# Altium PCB STM32F103Mini-260711.PcbDoc
Units mil, origin at the board's own origin, x right, y up, seen from the top; angles counter-clockwise.
Board outline 3149.61 x 2362.2 mil, 2 copper layers (Top Layer, Bottom Layer); 48 components, 52 nets, 221 pads, 78 vias.
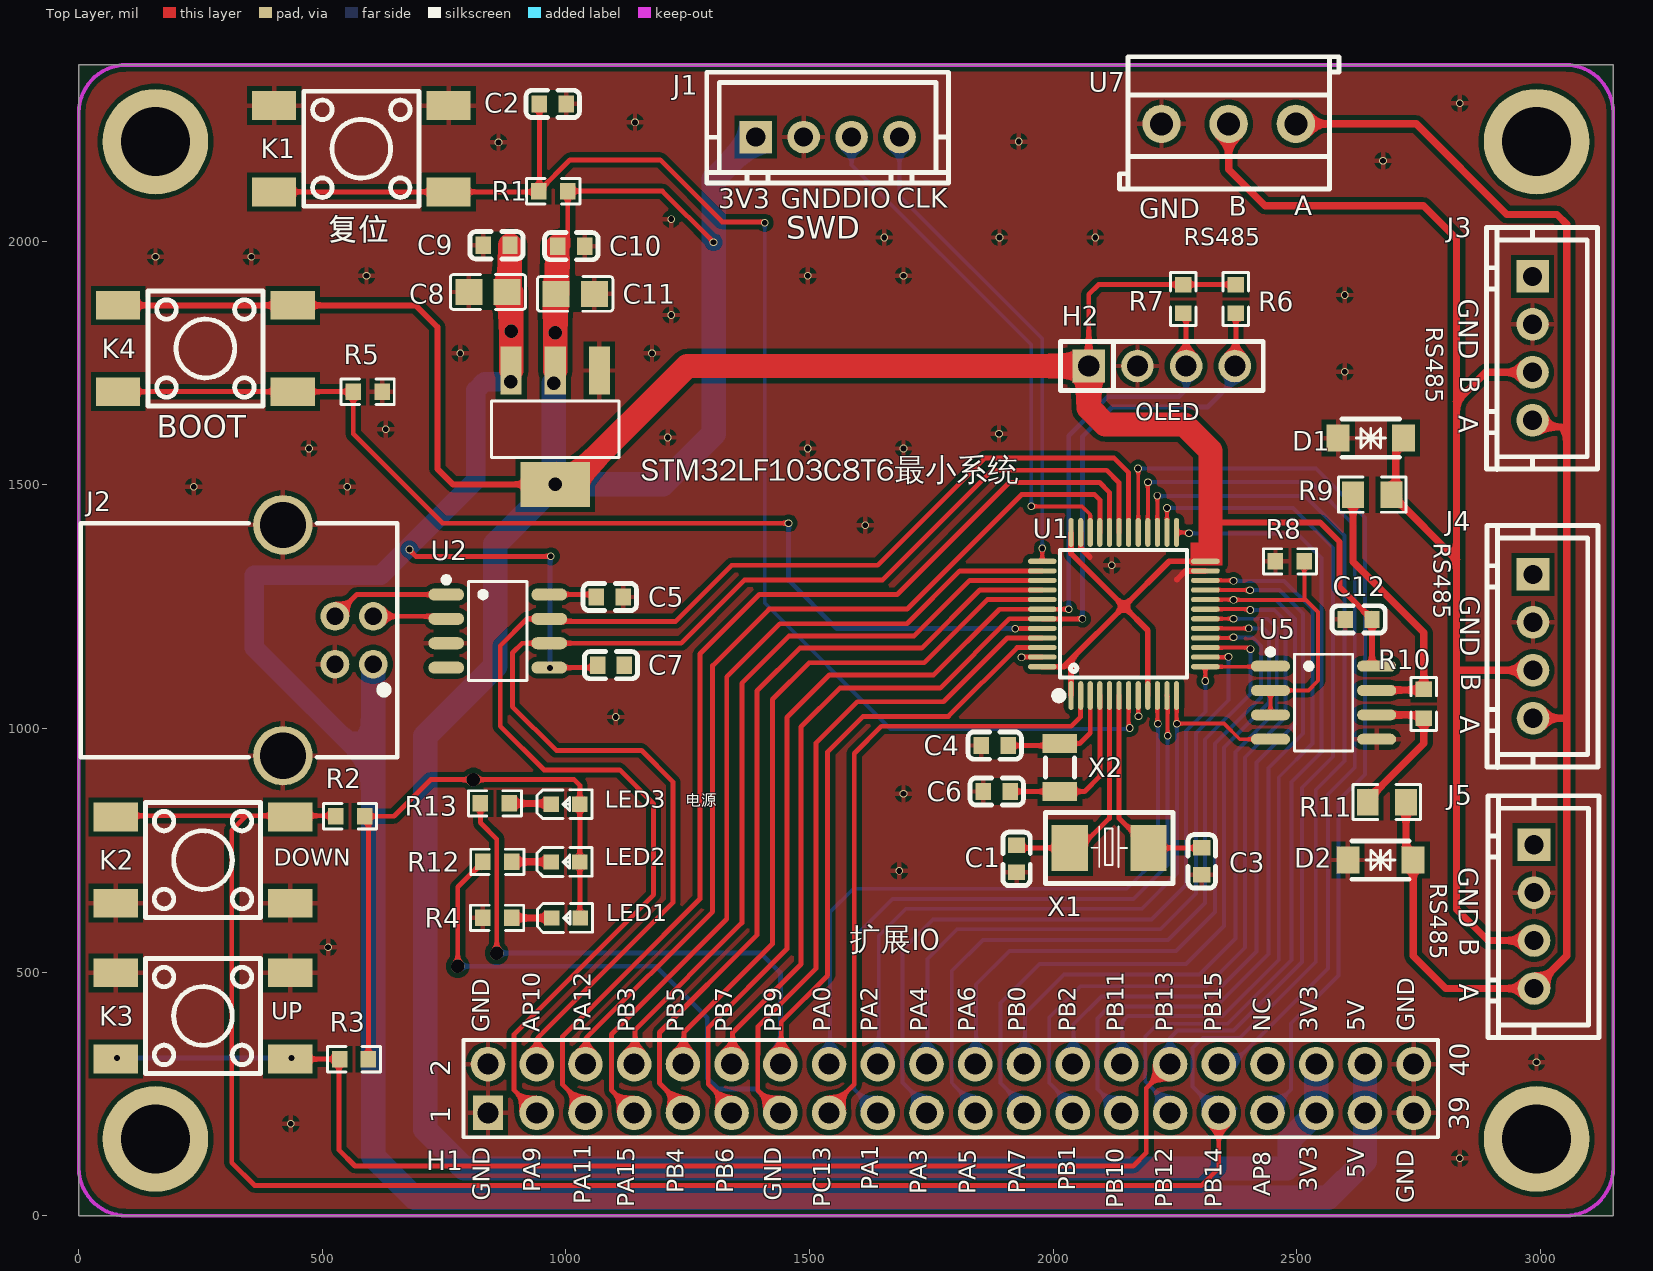
[diagram p0: Top Layer view]
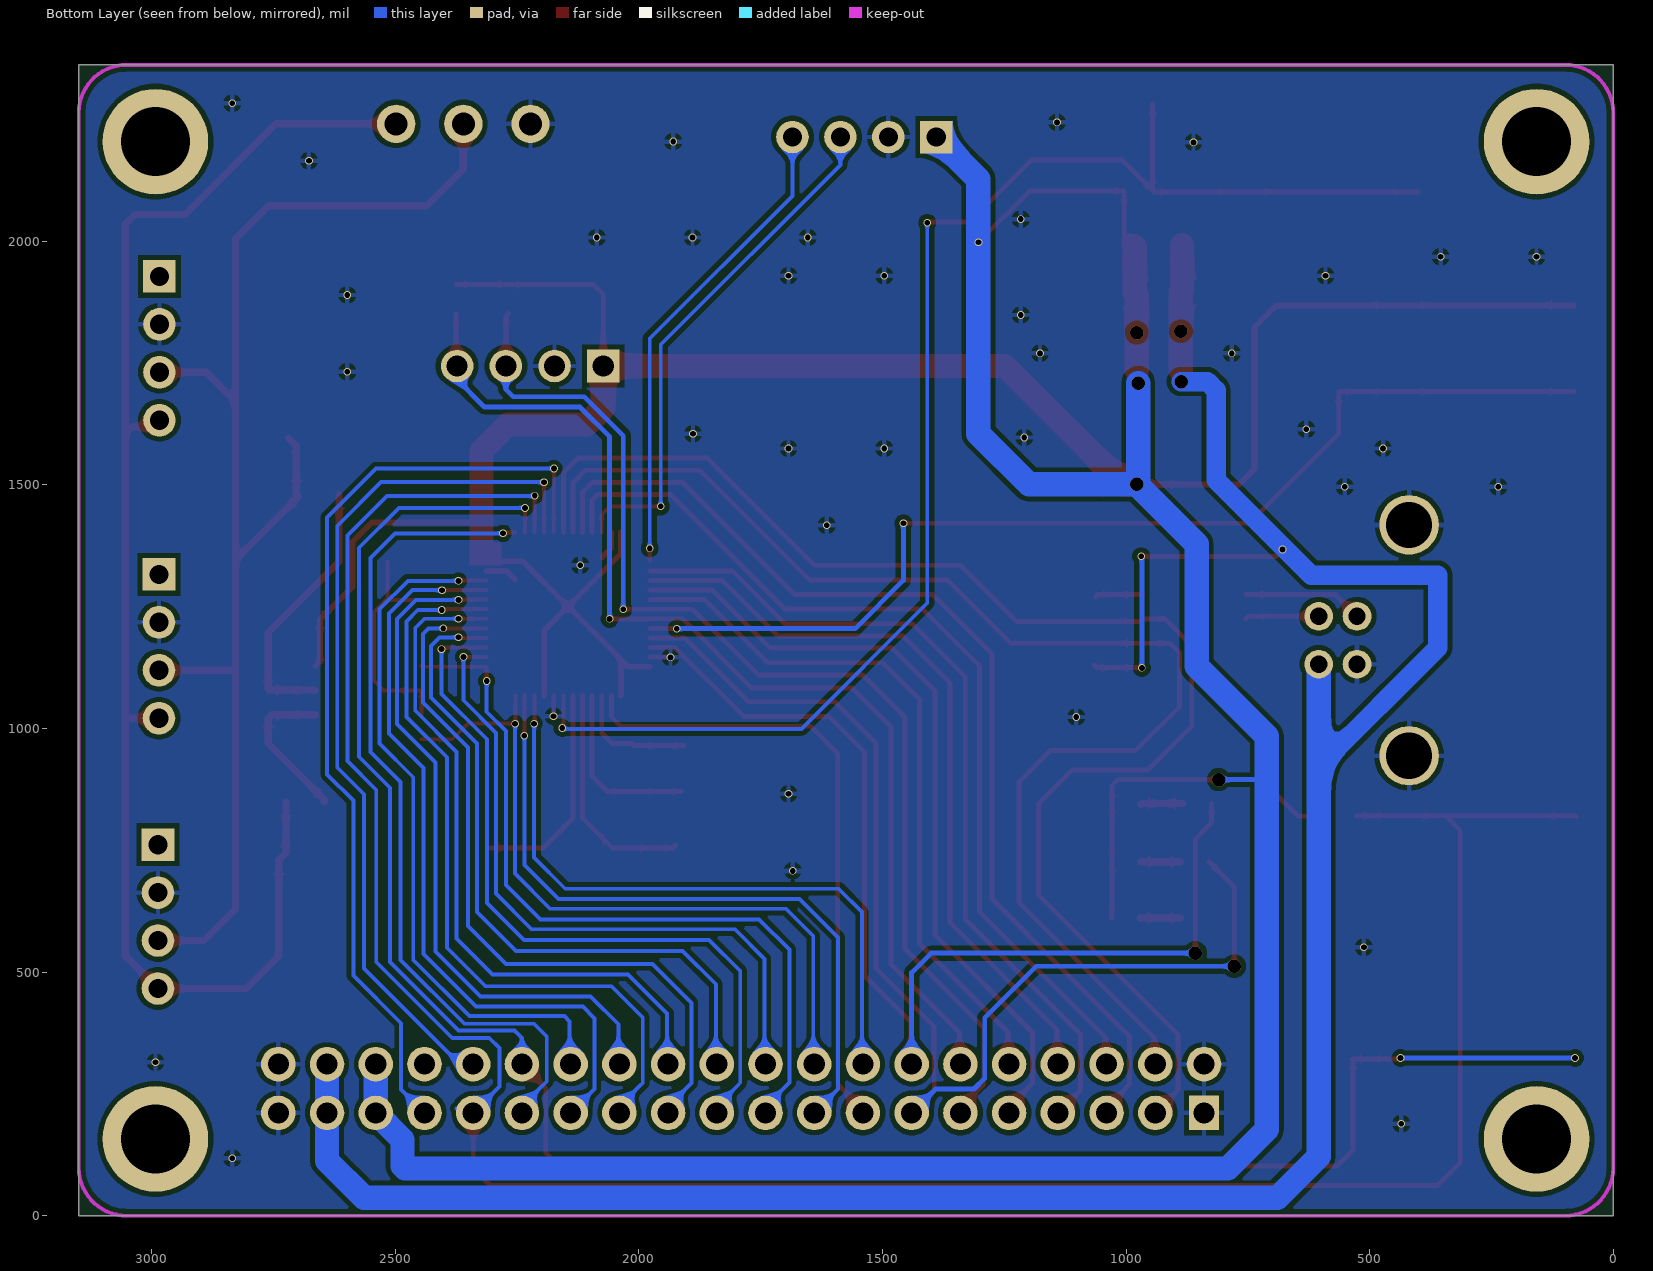
[diagram p1: Bottom Layer view, seen from below]

## Layer stack, top to bottom
Top Solder: solder mask 0.4, Solder Resist, Dk 3.5
Top Layer: signal copper 1.4
Dielectric 1: dielectric 12.6, FR-4, Dk 4.8
Bottom Layer: signal copper 1.4
Bottom Solder: solder mask 0.4, Solder Resist, Dk 3.5

## Board outline
0,0 0,2362.2 3149.61,2362.2 3149.61,0

## Design rules (kind name [scope] priority, off if disabled: settings)
Clearance Clearance_1 [InPolygon] p1: gap=10 ignorepadtopadclearanceinfootprint=TRUE
Clearance [All] p2: gap=0 ignorepadtopadclearanceinfootprint=TRUE
HoleSize [All] p1: absolutevalues=TRUE maxlimit=236.22 minlimit=1 maxpercent=80.000 minpercent=20.000
MinimumSolderMaskSliver [All] p1: minsoldermaskwidth=4
PolygonConnect [All] p1: connectstyle=Relief reliefconductorwidth=10 reliefentries=4 polygonreliefangle="90 Angle" airgapwidth=10
RoutingVias [All] p1: holewidth=11.81 width=15.75 viastyle="Through Hole" minholewidth=11.81 minwidth=15.75 maxholewidth=78.74 maxwidth=78.74
SilkToSilkClearance [All] p1: silktosilkclearance=4
SilkToSolderMaskClearance [IsPad] p1: minsilkscreentomaskgap=4 clearancetoexposedcopper=TRUE
SolderMaskExpansion [All] p1: expansion=4 istentingtop=FALSE
Width [All] p1: maxlimit=100 minlimit=6 preferedwidth=10
26 further rules are at their usual default settings.

## Components (designator, comment, footprint, x,y, rotation, side; value= is the part's Value field where it differs from the comment)
C1 "20pF" C0603 1925,732.5 r90 top
C2 "100nF" C0603 973,2282 r180 top
C3 "20pF" C0603 2305,727.4 r90 top
C4 "20pF" C0603 1880,965 r0 top
C5 "100nF" C0603 1090,1270 r0 top
C6 "20pF" C0603 1884.3,870.7 r0 top
C7 "100nF" C0603 1092.4,1130 r0 top
C8 "10uF" C0805 840,1896 r0 top
C9 "100nF" C0603 857.5,1992 r0 top
C10 "100nF" C0603 1011,1990 r180 top
C11 "10uF" C0805 1019,1892 r180 top
C12 "100nF" C0603 2627,1224 r180 top
D1 "SMF6.0CA" SOD-123FL_L2.8-W1.8-LS3.7-BI 2652,1596 r180 top
D2 "SMF6.0CA" SOD-123FL_L2.8-W1.8-LS3.7-BI 2672,730 r0 top
H1 "2.54mm 2*20p直排针" HDR-TH_40P-P2.54-V-M-R2-C20-S2.54 1790,261 r0 top
H2 "pm254v-11-04-h85" HDR-TH_4P-P2.54-V-F 2223,1744 r0 top
J1 "XH-4A" CONN-TH_4P-P2.50_XH-4A 1537,2214 r0 top locked
J2 "921-111a1010d10200" USB-B_TH_USB-B-FEMALE-90 511.81,1181.1 r270 top locked
J3 "XH-4A" CONN-TH_4P-P2.50_XH-4A 2984,1780.4 r270 top
J4 "XH-4A" CONN-TH_4P-P2.50_XH-4A 2985,1168.8 r270 top
J5 "XH-4A" CONN-TH_4P-P2.50_XH-4A 2987,614 r270 top
K1 "kh-6x6x5h-stm" SW-SMD_4P-L6.0-W6.0-P4.50-LS9.0_H5.0 580,2190 r180 top locked
K2 "kh-6x6x5h-stm" SW-SMD_4P-L6.0-W6.0-P4.50-LS9.0_H5.0 255,730 r0 top locked
K3 "kh-6x6x5h-stm" SW-SMD_4P-L6.0-W6.0-P4.50-LS9.0_H5.0 255,410 r180 top locked
K4 "kh-6x6x5h-stm" SW-SMD_4P-L6.0-W6.0-P4.50-LS9.0_H5.0 260,1780 r0 top locked
LED1 "ncd0603c1" LED0603-RD 1000,611 r0 top
LED2 "ncd0603c1" LED0603-RD 999,726 r0 top
LED3 "ncd0603c1" LED0603-RD 999,844.4 r0 top
R1 "10k" R0603 974,2103 r180 top value=10kΩ
R2 "10k" R0603 557,820 r180 top value=10kΩ
R3 "10k" R0603 565,321 r180 top value=10kΩ
R4 "1K" R0603 858.7,611.2 r0 top value=1kΩ
R5 "10k" R0603 593,1691 r0 top value=10kΩ
R6 "4.7k" R0603 2375,1881.6 r90 top value=10kΩ
R7 "4.7k" R0603 2267,1881.6 r90 top value=10kΩ
R8 "10k" R0603 2486,1343 r180 top value=10kΩ
R9 "20R" R0805 2655,1480 r180 top value=20Ω
R10 "120R" R0603 2760.85,1050.45 r90 top value=120Ω
R11 "20R" R0805 2685,849 r180 top value=20Ω
R12 "1K" R0603 859.1,726.2 r0 top value=1kΩ
R13 "1K" R0603 854.1,846.2 r0 top value=1kΩ
U1 "STM32F103C8T6" LQFP-48_L7.0-W7.0-P0.50-LS9.0-BL 2145,1235 r0 top
U2 "CH340N" SOP-8_L4.9-W3.9-P1.27-LS6.0-BL 860,1200 r270 top locked
U5 "SP3485EEN" SOP-8_L5.0-W4.0-P1.27-LS6.0-BL 2555,1053 r270 top
U7 "KF350-3.5-3P" CONN-TH_3P-P3.50_KF350-3.5-3P 2360.2,2241 r0 top
X1 "8MHz" CRYSTAL-SMD_L5.0-W3.2 2115,755 r180 top
X2 "32.768kHz" FC-135R_L3.2-W1.5 2014,920 r90 top
? "AMS1117-3.3" SOT-223-3_L6.5-W3.4-P2.30-LS7.0-BR 978,1618 r90 top

## Footprints (in the part's own frame and the unit in brackets; to place one, negate y for a bottom-side part, rotate by r counter-clockwise, add the part's x,y. Pads: shape width x height; smd on the part's side, far side on the other; paste and mask are expansions set on the pad)
C0603 [mil]
  rect 31.5x35.4 smd: 1(-27.5,0) 2(27.6,0)
  silkscreen extent -55,-28 55,28
C0805 [mil]
  rect 55.5x53.1 smd paste-3937 mask+2: 1(-39.4,0) 2(39.4,0)
  silkscreen extent -77,-36 77,36
CONN-TH_3P-P3.50_KF350-3.5-3P [mil]
  round 78.7 hole 47.2: 1(-137.8,0) 2(0,0) 3(137.8,0)
  silkscreen extent -224,-134 226,138
CONN-TH_4P-P2.50_XH-4A [mil]
  rect 66.9x66.9 hole 39.4: 1(-147.6,0)
  round 66.9 hole 39.4: 2(-49.2,0) 3(49.2,0) 4(147.7,0)
  silkscreen extent -248,-94 248,133
CRYSTAL-SMD_L5.0-W3.2 [mil]
  rect 74.8x94.5 smd: 1(-80.7,0) 2(80.7,0)
  silkscreen extent -131,-73 131,73
FC-135R_L3.2-W1.5 [mil]
  rect 39.4x70.9 smd: 1(-49.3,0) 2(49.2,0)
  silkscreen extent -20,-30 20,30
HDR-TH_4P-P2.54-V-F [mil]
  rect 66.9x66.9 hole 43.3: 1(-150,0)
  round 66.9 hole 43.3: 2(-50,0) 3(50,0) 4(150,0)
  silkscreen extent -208,-50 208,50
HDR-TH_40P-P2.54-V-M-R2-C20-S2.54 [mil]
  rect 62x70.9 hole 43.3: 1(-950,-50)
  round 70.9 hole 43.3: 2(-950,50) 3(-850,-50) 4(-850,50) 5(-750,-50) 6(-750,50) 7(-650,-50) 8(-650,50) 9(-550,-50) 10(-550,50) 11(-450,-50) 12(-450,50) 13(-350,-50) 14(-350,50) 15(-250,-50) 16(-250,50) 17(-150,-50) 18(-150,50) 19(-50,-50) 20(-50,50) 21(50,-50) 22(50,50) 23(150,-50) 24(150,50) 25(250,-50) 26(250,50) 27(350,-50) 28(350,50) 29(450,-50) 30(450,50) 31(550,-50) 32(550,50) 33(650,-50) 34(650,50) 35(750,-50) 36(750,50) 37(850,-50) 38(850,50) 39(950,-50) 40(950,50)
  silkscreen extent -1000,-100 1000,100
LED0603-RD [mil]
  rect 31.5x31.5 smd: 1(-29.4,0) 2(29.5,0)
  silkscreen extent -59,-29 55,30
LQFP-48_L7.0-W7.0-P0.50-LS9.0-BL [mil]
  oval 10.6x59.1 smd paste+0 mask+2: 1(-108.2,-167.3) 2(-88.5,-167.3) 3(-68.9,-167.3) 4(-49.2,-167.3) 5(-29.5,-167.3) 6(-9.8,-167.3) 7(9.9,-167.3) 8(29.6,-167.3) 9(49.3,-167.3) 10(68.9,-167.3) 11(88.6,-167.3) 12(108.3,-167.3) 25(108.3,167.4) 26(88.6,167.4) 27(68.9,167.4) 28(49.3,167.4) 29(29.6,167.4) 30(9.9,167.4) 31(-9.8,167.4) 32(-29.5,167.4) 33(-49.2,167.4) 34(-68.9,167.4) 35(-88.5,167.4) 36(-108.2,167.4)
  oval 59.1x10.6 smd paste+0 mask+2: 13(167.4,-108.2) 14(167.4,-88.5) 15(167.4,-68.9) 16(167.4,-49.2) 17(167.4,-29.5) 18(167.4,-9.8) 19(167.4,9.9) 20(167.4,29.6) 21(167.4,49.3) 22(167.4,68.9) 23(167.4,88.6) 24(167.4,108.3) 37(-167.3,108.3) 38(-167.3,88.6) 39(-167.3,68.9) 40(-167.3,49.3) 41(-167.3,29.6) 42(-167.3,9.9) 43(-167.3,-9.8) 44(-167.3,-29.5) 45(-167.3,-49.2) 46(-167.3,-68.9) 47(-167.3,-88.5) 48(-167.3,-108.2)
  silkscreen extent -141,-176 130,132
R0603 [mil]
  rect 31.8x34 smd paste-3937 mask+2: 1(-29.6,0) 2(29.7,0)
  silkscreen extent -54,-26 55,26
R0805 [mil]
  rect 44.6x54.2 smd paste-3937 mask+2: 1(-39.3,0) 2(39.4,0)
  silkscreen extent -69,-36 69,36
SOD-123FL_L2.8-W1.8-LS3.7-BI [mil]
  rect 47.2x55.1 smd: 1(-67,0) 2(66.9,0)
  silkscreen extent -59,-39 59,39
SOP-8_L4.9-W3.9-P1.27-LS6.0-BL [mil]
  oval 24.8x73.4 smd: 1(-75,-105.6) 2(-25,-105.6) 3(25,-105.6) 4(75,-105.6) 5(75,105.6) 6(25,105.6) 7(-25,105.6) 8(-75,105.6)
  silkscreen extent -111,-111 101,60
SOP-8_L5.0-W4.0-P1.27-LS6.0-BL [mil]
  oval 22.6x80.1 smd: 1(-75,-108.9) 2(-25,-108.9) 3(25,-108.9) 4(75,-108.9) 5(75,109) 6(25,109) 7(-25,109) 8(-75,109)
  silkscreen extent -110,-115 100,60
SOT-223-3_L6.5-W3.4-P2.30-LS7.0-BR [mil]
  rect 98.4x43.3 smd: 1(116.9,-90.6) 2(116.9,0) 3(116.9,90.5)
  rect 92.1x141.7 smd: 4(-116.9,0)
  silkscreen extent -62,-131 54,131
SW-SMD_4P-L6.0-W6.0-P4.50-LS9.0_H5.0 [mil]
  rect 90.6x59.1 smd: 1(-179.1,88.6) 2(179.1,88.6) 3(-179.1,-88.6) 4(179.1,-88.6)
  silkscreen extent -118,-118 118,118
USB-B_TH_USB-B-FEMALE-90 [mil]
  round 59.1 hole 35.4: 1(49.2,92.7) 2(-49.2,92.7) 3(-49.2,14) 4(49.2,14)
  round 122 hole 94.5: 5(-237,-92.8) 6(237,-92.8)
  silkscreen extent -240,-508 240,142

## Part data
C1 C3 C4 C6: library part cl10c200jb8nnnc, "容值:20pF;精度:±5%;额定电压:50V;温度系数:C0G;", JLCPCB Part Class="Basic Part", LCSC Part Name="20pF ±5% 50V", Manufacturer=SAMSUNG(三星), ManufacturerPart=CL10C200JB8NNNC, Temperature Coefficient=C0G, Tolerance=±5%, Voltage Rating=50V, AddInBom=yes, ConvertToPcb=yes, Datasheet=https://item.szlcsc.com/datasheet/CL10C200JB8NNNC/2000.html, FootprintName=C0603, ModelId=ac125912035d415993ca9572d50418b1, ModelName=C0603_L1.6-W0.8-H0.8, ModelTransform=62.992,31.496,0,0,0,0,0,0,0, Supplier=LCSC, Supplier Footprint=0603, SupplierPart=C1648, Symbol=CL10C200JB8NNNC
C2 C5 C7 C9 C10 C12: library part cc0603krx7r9bb104, "容值:100nF;精度:±10%;额定电压:50V;温度系数:X7R;", JLCPCB Part Class="Basic Part", LCSC Part Name="100nF ±10% 50V", Manufacturer=YAGEO(国巨), ManufacturerPart=CC0603KRX7R9BB104, Temperature Coefficient=X7R, Tolerance=±10%, Voltage Rating=50V, AddInBom=yes, ConvertToPcb=yes, Datasheet=https://item.szlcsc.com/datasheet/CC0603KRX7R9BB104/15331.html, FootprintName=C0603, ModelId=ac125912035d415993ca9572d50418b1, ModelName=C0603_L1.6-W0.8-H0.8, ModelTransform=62.992,31.496,0,0,0,0,0,0,0, Supplier=LCSC, Supplier Footprint=0603, SupplierPart=C14663, Symbol=CC0603KRX7R9BB104
C8 C11: library part cl21a106kaynnne_c15850, "容值:10uF;精度:±10%;额定电压:25V;温度系数:X5R;", JLCPCB Part Class="Basic Part", LCSC Part Name="10uF ±10% 25V", Manufacturer=SAMSUNG(三星), ManufacturerPart=CL21A106KAYNNNE, Temperature Coefficient=X5R, Tolerance=±10%, Voltage Rating=25V, AddInBom=yes, ConvertToPcb=yes, Datasheet=https://item.szlcsc.com/datasheet/CL21A106KAYNNNE/16532.html, FootprintName=C0805, ModelId=1ba041120af144c991958decab20d241, ModelName=C0805_L2.0-W1.3-H1.3, ModelTransform=78.74,51.181,0,0,0,0,0,0.0005,0, Supplier=LCSC, Supplier Footprint=0805, SupplierPart=C15850, Symbol=CL21A106KAYNNNE
D1 D2: library part smf6.0ca_c2990473, "极性:双向;反向截止电压(Vrwm):6V;钳位电压:10.3V;峰值脉冲电流(Ipp):19.4A;峰值脉冲功率(Ppp):200W;击穿电压:6.67V;", Clamping Voltage=10.3V, JLCPCB Part Class="Extended Part", LCSC Part Name="双向TVS 6V截止 峰值浪涌电流：19.4A", Manufacturer=Liown(里阳半导体), Operating Temperature=-55℃~+150℃, Peak Pulse Current (Ipp)=19.4A, Peak Pulse Power Dissipation (Ppp)=200W, Reverse Leakage Current (Ir)=400uA, Reverse Stand-Off Voltage (Vrwm)=6V, Voltage - Breakdown=6.67V, AddInBom=yes, ConvertToPcb=yes, Datasheet=https://item.szlcsc.com/datasheet/SMF6.0CA/3449907.html, FootprintName=SOD-123FL_L2.8-W1.8-LS3.7-BI, level of protection="IEC 61000-4-2", ManufacturerPart=SMF6.0CA, ModelId=d105299b3871451c86f679efef28ff8f, ModelName=SOD-123FL_L2.8-W1.8-LS3.7-BI, ModelTransform=145.669,70.866,0,0,0,0,0,0,0, Polarity=双向, Supplier=LCSC, Supplier Footprint=SOD-123FL, SupplierPart=C2990473, Symbol=SMF6.0CA_C2990473, Type=TVS
H1: "插针结构:2x20P;间距:2.54mm;行距:2.54mm;圆针/方针:方针;安装方式:直插;排数:双排;总PIN位数:40P;额定电流:3A;额定电压:-;配合针长度:6mm;塑高:-;端接针长度:3mm;触头材质:黄铜;触头镀层:-;工作温度:-40℃~+105℃;颜色:黑色;", Color=黑色, Current Rating=3A, JLCPCB Part Class="Extended Part", LCSC Part Name="2x20P 间距:2.54mm 方针 直插", Manufacturer=BOOMELE(博穆精密), ManufacturerPart="2.54mm 2*20P直排针", Operating Temperature=-40℃~+105℃, Voltage Rating (Max)=-, AddInBom=yes, Circluar Pins/Square Pins=方针, Contact Material=黄铜, Contact Plating=-, ConvertToPcb=yes, Datasheet=https://item.szlcsc.com/datasheet/2.54mm%25202*20P%25E7%259B%25B4%25E6%258E%2592%25E9%2592%2588/51992.html, FootprintName=HDR-TH_40P-P2.54-V-M-R2-C20-S2.54, Insulation Height=-, Length of End Connection Pin=3mm, Length of Mating Pin=6mm, ModelId=2f697d2f705a4509bdac70452e51b3cc, ModelName=HDR-TH_40P-P2.54-M-LI-2X20P, ModelTransform=1999.996,196.85,0,0,0,0,0,0,-118.11, Mounting Type=直插, Number of Pins=40P, Number of Rows=双排, Pin Structure=2x20P, Pitch=2.54mm, Row Spacing=2.54mm, Supplier=LCSC, Supplier Footprint=插件,P=2.54mm, SupplierPart=C50980, Symbol=Header-Male-2.54_2x20
H2: "插孔结构:1x4P;间距:2.54mm;行距:-;圆孔/方孔:方孔;安装方式:直插;排数:单排;总孔位数:4P;额定电流:3A;插孔方向:顶部;塑高:8.5mm;触头材质:黄铜;触头镀层:-;工作温度:-40℃~+105℃;", Current Rating=3A, JLCPCB Part Class="Extended Part", LCSC Part Name="1x4P 间距:2.54mm 直插", Manufacturer=XFCN(兴飞), ManufacturerPart=PM254V-11-04-H85, Operating Temperature=-40℃~+105℃, AddInBom=yes, Circular Hole / Square Hole=方孔, Contact Material=黄铜, Contact Plating=-, ConvertToPcb=yes, Datasheet=https://item.szlcsc.com/datasheet/PM254V-11-04-H85/562472.html, FootprintName=HDR-TH_4P-P2.54-V-F, Holes Direction=顶部, Holes Structure=1x4P, Insulation Height=8.5mm, ModelId=d187812051054f85879fcaa51a310d8e, ModelName=HDR-TH_4P-P2.54-V-F, ModelTransform=419.6842,98.464,0,0,0,0,0,0,-118.11, Mounting Type=直插, Number of Positions=4P, Number of Rows=单排, Pitch=2.54mm, Row Spacing=-, Supplier=LCSC, Supplier Footprint=插件,P=2.54mm, SupplierPart=C541851, Symbol=PM254V-11-04-H85
J1 J3 J4 J5: library part xh-4a_c37815, "插针结构:1x4P;间距:2.5mm;安装方式:直插;参考系列:XH;总PIN数:4P;排数:1;每排PIN数:4;行距:-;额定电流:-;触头材质:-;触头镀层:-;工作温度:-;", Color=白色, Current Rating=-, JLCPCB Part Class="Extended Part", LCSC Part Name="1x4P 间距:2.5mm 直插 系列:XH", Manufacturer=BOOMELE(博穆精密), AddInBom=yes, Contact Material=-, Contact Plating=-, ConvertToPcb=yes, Datasheet=https://item.szlcsc.com/datasheet/XH-4A/38795.html, Flame Retardant Rating=-, FootprintName=CONN-TH_4P-P2.50_XH-4A, ManufacturerPart=XH-4A, ModelId=5fb049f4745545a5b3e6d8e7931866fa, ModelName=CONN-TH_4P-P2.50_XH-4A, ModelTransform=492.125,224.409,0,180,0,0,0,17.913,-98.425, Mounting Type=直插, Number of Pins=4P, Number of PINs Per Row=4, Number of Rows=1, Operating Temperature=-, Pins Structure=1x4P, Pitch=2.5mm, Plastic Material=-, Reference Series=XH, Row Spacing=-, Supplementary Features=-, Supplier=LCSC, Supplier Footprint=插件,P=2.5mm, SupplierPart=C37815, Symbol=XH-4A, Voltage Rating=-, X-Length of Bottom Edge on Board (Spacing Line)=12.5mm, Y-Width of Bottom Edge on Board=5.8mm, Z-Height of the Board=7mm
J2: "连接器类型:Type-B;协议标准:USB 2.0;公母:母;安装方式:弯插;触点数量:4P;端口数量:1;", Detection color=白色, JLCPCB Part Class="Extended Part", LCSC Part Name="Type-B 母 弯插", Manufacturer=精拓金, ManufacturerPart=921-111A1010D10200, AddInBom=yes, Connector Type=Type-B, ConvertToPcb=yes, Datasheet=https://item.szlcsc.com/datasheet/921-111A1010D10200/47396.html, FootprintName=USB-B_TH_USB-B-FEMALE-90, Gender=母, Length=16.3mm, ModelId=427257db465a432d8a34b597c871403b, ModelName=USB-B_TH_USB-B-FEMALE-90, ModelTransform=544.04938,649.605,0,0,0,0,-0.005,-175.199,-118.11, Mounting Type=弯插, Number of Contacts=4P, Number of Ports=1, Protocol Standard="USB 2.0", Supplier=LCSC, Supplier Footprint=插件, SupplierPart=C46392, Symbol=USB-B-Female-90
K1 K2 K3 K4: "电路结构:单刀单掷;按钮形状:圆形按钮;安装方式:立贴;开关长度:6mm;开关宽度:6mm;开关高度:5mm;带支架:不带支架;触点电流:50mA;额定电压:12V;工作寿命:8万次;", Actuator/Cap Color=黑色, Contact Current=50mA, JLCPCB Part Class="Extended Part", LCSC Part Name="6*6*5mm 立贴 轻触开关", Manufacturer=kinghelm(金航标), ManufacturerPart=KH-6X6X5H-STM, Voltage Rating=12V, Actuator Style=圆形按钮, AddInBom=yes, Circuit=单刀单掷, ConvertToPcb=yes, Datasheet=https://item.szlcsc.com/datasheet/KH-6X6X5H-STM/3009601.html, FootprintName=SW-SMD_4P-L6.0-W6.0-P4.50-LS9.0_H5.0, Length=6mm, Life=8万次, ModelId=46371efb35684031937580a0045530ec, ModelName=SW-SMD_4P-L6.0-W6.0-P4.50-LS9.0_H5.0, ModelTransform=354.33,236.25937,0,0,0,0,0,0,0, Mounting Type=立贴, Supplier=LCSC, Supplier Footprint=SMD-4P,6x6mm, SupplierPart=C2837531, Switch Height=5mm, Symbol=KH-6X6X5H-STM, Termination Style=鸥翼型, Width=6mm, with Bracket=不带支架
LED1 LED2 LED3: "灯头类型:-;发光颜色:黄绿色;正向压降(Vf):1.6V~2.6V;功率:65mW;正向电流:25mA;波长:565nm~578nm;二极管配置:独立二极管;透镜颜色:-;色温:-;发光强度:13mcd;发光角度:140°;载带方式:-;工作温度:-30℃~+85℃;", Color Temperature=-, Forward Current=25mA, Illumination Color=黄绿色, JLCPCB Part Class="Extended Part", LCSC Part Name=片式发光二极管, Manufacturer=国星光电, ManufacturerPart=NCD0603C1, Operating Temperature=-30℃~+85℃, Power(Watts)=65mW, Voltage - Forward(Vf)=1.6V~2.6V, AddInBom=yes, ConvertToPcb=yes, Datasheet=https://item.szlcsc.com/datasheet/NCD0603C1/85433.html, Diode Configuration=独立二极管, FootprintName=LED0603-RD, Lamp Holder Type=-, Lens Color=-, Luminous Intensity=13mcd, ModelId=1f0d29a91be547639d425604e9b96ebb, ModelName=LED0603-RD, ModelTransform=63.7794,32.283,0,0,0,0,0,0,0, Mounting Style=-, Peak Wavelength=576nm, Supplier=LCSC, Supplier Footprint=0603, SupplierPart=C84264, Symbol=FC-D1608HGK-572C, Viewing Angle=140°, Wavelength - Dominant=565nm~578nm
R1 R2 R3 R5 R6 R7 R8: library part 0603waf1002t5e, "电阻类型:厚膜电阻;阻值:10kΩ;精度:±1%;功率:100mW;工作电压:75V;温度系数:±100ppm/℃;", JLCPCB Part Class="Basic Part", LCSC Part Name="厚膜电阻 10kΩ ±1% 100mW", Manufacturer=UNI-ROYAL(厚声), ManufacturerPart=0603WAF1002T5E, Operating Temperature=-55℃~+155℃, Power(Watts)=100mW, Temperature Coefficient=±100ppm/℃, Tolerance=±1%, Voltage-Supply(Max)=75V, AddInBom=yes, ConvertToPcb=yes, Datasheet=https://item.szlcsc.com/datasheet/0603WAF1002T5E/26547.html, FootprintName=R0603, ModelId=fc143cca1e79419f9cd78b61e9279f08, ModelName=R0603, ModelTransform=31.8897,63.7794,0,90,0,0,0,0,0, Supplier=LCSC, Supplier Footprint=0603, SupplierPart=C25804, Symbol=0603WAF1002T5E, Type=厚膜电阻
R4 R12 R13: library part 0603waf1001t5e, "电阻类型:厚膜电阻;阻值:1kΩ;精度:±1%;功率:100mW;工作电压:75V;温度系数:±100ppm/℃;", JLCPCB Part Class="Basic Part", LCSC Part Name="1kΩ ±1% 100mW 厚膜电阻", Manufacturer=UNI-ROYAL(厚声), ManufacturerPart=0603WAF1001T5E, Operating Temperature=-55℃~+155℃, Power(Watts)=100mW, Temperature Coefficient=±100ppm/℃, Tolerance=±1%, Voltage-Supply(Max)=75V, AddInBom=yes, ConvertToPcb=yes, Datasheet=https://item.szlcsc.com/datasheet/0603WAF1001T5E/21904.html, FootprintName=R0603, ModelId=fc143cca1e79419f9cd78b61e9279f08, ModelName=R0603, ModelTransform=31.8897,63.7794,0,90,0,0,0,0,0, Supplier=LCSC, Supplier Footprint=0603, SupplierPart=C21190, Symbol=0603WAF1001T5E, Type=厚膜电阻
R9 R11: library part 0805w8f200jt5e, "电阻类型:厚膜电阻;阻值:20Ω;精度:±1%;功率:125mW;工作电压:150V;温度系数:±100ppm/℃;", JLCPCB Part Class="Basic Part", LCSC Part Name="20Ω ±1% 125mW 厚膜电阻", Manufacturer=UNI-ROYAL(厚声), ManufacturerPart=0805W8F200JT5E, Operating Temperature=-55℃~+155℃, Power(Watts)=125mW, Temperature Coefficient=±100ppm/℃, Tolerance=±1%, Voltage-Supply(Max)=150V, AddInBom=yes, ConvertToPcb=yes, Datasheet=https://item.szlcsc.com/datasheet/0805W8F200JT5E/18232.html, FootprintName=R0805, ModelId=37a81e68749a4138bd2dfa6897b24b85, ModelName=R0805_L2.0-W1.3-H0.6, ModelTransform=78.74,51.181,0,0,0,0,0,-0.0005,0, Supplier=LCSC, Supplier Footprint=0805, SupplierPart=C17544, Symbol=0805W8F200JT5E, Type=厚膜电阻
R10: library part 0603waf1200t5e, "电阻类型:厚膜电阻;阻值:120Ω;精度:±1%;功率:100mW;工作电压:75V;温度系数:±100ppm/℃;", JLCPCB Part Class="Basic Part", LCSC Part Name="120Ω ±1% 100mW 厚膜电阻", Manufacturer=UNI-ROYAL(厚声), ManufacturerPart=0603WAF1200T5E, Operating Temperature=-55℃~+155℃, Power(Watts)=100mW, Temperature Coefficient=±100ppm/℃, Tolerance=±1%, Voltage-Supply(Max)=75V, AddInBom=yes, ConvertToPcb=yes, Datasheet=https://item.szlcsc.com/datasheet/0603WAF1200T5E/23514.html, FootprintName=R0603, ModelId=fc143cca1e79419f9cd78b61e9279f08, ModelName=R0603, ModelTransform=31.8897,63.7794,0,90,0,0,0,0,0, Supplier=LCSC, Supplier Footprint=0603, SupplierPart=C22787, Symbol=0603WAF1200T5E, Type=厚膜电阻
U1: library part stm32f103c8t6, "CPU内核:ARM-M3;CPU最大主频:72MHz;应用领域:-;", JLCPCB Part Class="Extended Part", LCSC Part Name="主流增强型ARM Cortex-M3 MCU，具有64 KB Flash、72 MHz CPU、电机控制、USB和CAN", Manufacturer=ST(意法半导体), Voltage - Supply=2V~3.6V, ADC (Bit)=12bit, AddInBom=yes, Applications=-, ConvertToPcb=yes, CPU Core=ARM-M3, CPU Maximum Speed=72MHz, Datasheet=https://item.szlcsc.com/datasheet/STM32F103C8T6/9243.html, FootprintName=LQFP-48_L7.0-W7.0-P0.50-LS9.0-BL, ManufacturerPart=STM32F103C8T6, ModelId=093be70396ff421eb2cdb946d5311efc, ModelName=LQFP-48_L7.0-W7.0-H1.4-LS9.0-P0.50, ModelTransform=354.331,354.331,0,0,0,0,0,0,0, Number of I/O=37, Program Memory Type=FLASH, Program Storage Size=64KB, Supplier=LCSC, Supplier Footprint=LQFP-48(7x7), SupplierPart=C8734, Symbol=STM32F103C8T6
U2: library part ch340n, "应用功能:USB转串口;USB协议版本:USB 2.0;通道数:1;数据速率:2Mbps;", JLCPCB Part Class="Extended Part", LCSC Part Name=USB2.0芯片CH340, Manufacturer=WCH(南京沁恒), Operating Temperature=-20℃~+70℃, Voltage - Supply=3.3V；5V, AddInBom=yes, Applications Function=USB转串口, ConvertToPcb=yes, Data Rate=2Mbps, Datasheet=https://item.szlcsc.com/datasheet/CH340N/3390257.html, Features=可编程波特率；内置时钟发生器；上电复位, FootprintName=SOP-8_L4.9-W3.9-P1.27-LS6.0-BL, ManufacturerPart=CH340N, ModelId=75c24a7891ee4dd6bdac16a7163ff87e, ModelName=SOP-8_L4.9-W3.9-P1.27-LS6.0-BL-1, ModelTransform=192.913,236.22,0,0,0,0,-0.393,2.749,0, Number of Channels=1, Supplier=LCSC, Supplier Footprint=SOP-8, SupplierPart=C2977777, Symbol=CH340N_C2977777, USB Protocol="USB 2.0"
U5: library part sp3485een(umw), "类型:收发器;数据速率:12Mbps;", JLCPCB Part Class="Extended Part", LCSC Part Name="SP3485E 3.3V电源，最多256个节点，12Mbps半双工，RS485/RS422收发器", Manufacturer=UMW(友台半导体), ManufacturerPart=SP3485EEN(UMW), Operating Temperature=-40℃~+85℃, Supply Current (Iq)=520uA, Voltage - Supply=2.97V~3.63V, AddInBom=yes, Communication Mode=半双工, ConvertToPcb=yes, Data Rate=12Mbps, Datasheet=https://item.szlcsc.com/datasheet/SP3485EEN(UMW)/698053.html, FootprintName=SOP-8_L5.0-W4.0-P1.27-LS6.0-BL, ModelId=a3315c1c78f949e6bb82c6eaca1c53c7, ModelName=SOP-8_L5.0-W4.0-H1.8-LS6.2-P1.27, ModelTransform=244.094,196.85,0,90,0,0,0,0,0, Number of Drivers=1, Number of Nodes=256, Number of Receivers=1, Supplier=LCSC, Supplier Footprint=SOP-8, SupplierPart=C668205, Symbol=SP3485EEN, Type=收发器
U7: library part kf350-3.5-3p, "结构:1x3P;间距:3.5mm;颜色:绿色;安装方式:直插;排数:1;每排PIN数:3;额定电流:10A;额定电压:300V;线规 - AWG:18~24;线规 - 平方毫米:0.75;工作温度:-40℃~+105℃;", Color=绿色, Current Rating=10A, JLCPCB Part Class="Extended Part", LCSC Part Name="1x3P 3.5mm 直插 排数:1 每排P数:3", Manufacturer=KEFA(科发), Operating Temperature=-40℃~+105℃, Voltage Rating (Max)=300V, AddInBom=yes, ConvertToPcb=yes, Datasheet=https://item.szlcsc.com/datasheet/KF350-3.5-3P/481511.html, FootprintName=CONN-TH_3P-P3.50_KF350-3.5-3P, ManufacturerPart=KF350-3.5-3P, ModelId=66d6ea4170124c3f83d623ee30815f83, ModelName=CONN-TH_3P-P3.50_KF350-3.5-3P, ModelTransform=444.881,271.653,0,0,0,0,-0.005,1.969,-137.795, Mounting Type=直插, Number of Pins=3P, Number of PINs Per Row=3, Number of Positions or Pins=1x3P, Number of Rows=1, Pitch=3.5mm, Supplier=LCSC, Supplier Footprint=插件,P=3.5mm, SupplierPart=C474893, Symbol=KF350-3.5-3P, Wire Gauge - AWG=18~24, Wire Gauge - mm2=0.75
X1: library part x50328msb2gi, "晶振类型:贴片晶振;频率:8MHz;常温频差:±10ppm;负载电容:20pF;频率稳定度:±20ppm;", Frequency Stability=±20ppm, JLCPCB Part Class="Basic Part", LCSC Part Name="YSX530GA 8MHZ 2P 5032 20PF ±10PPM -40~85℃ (±20PPM)", Load Capacitance=20pF, Manufacturer=YXC(扬兴晶振), ManufacturerPart=X50328MSB2GI, Normal temperature Frequency Tolerance=±10ppm, Operating Temperature=-40℃~+85℃, AddInBom=yes, ConvertToPcb=yes, Datasheet=https://item.szlcsc.com/datasheet/X50328MSB2GI/117214.html, FootprintName=CRYSTAL-SMD_L5.0-W3.2, ModelId=d7c39c66443246ff83c2003c1e1eb6f1, ModelName=CRYSTAL-SMD_L5.0-W3.2, ModelTransform=196.85,125.984,0,0,0,0,0,0,0, Supplier=LCSC, Supplier Footprint=SMD5032-2P, SupplierPart=C115962, Symbol=X50328MSB2GI, Type=贴片晶振
X2: library part q13fc13500004_c32346, "晶振类型:贴片晶振;频率:32.768kHz;常温频差:±20ppm;负载电容:12.5pF;", Equivalent Series Resistance(ESR)=70kΩ, JLCPCB Part Class="Basic Part", LCSC Part Name="32.768kHz ±20ppm 12.5pF", Load Capacitance=12.5pF, Manufacturer=EPSON(爱普生), ManufacturerPart=Q13FC13500004, Normal temperature Frequency Tolerance=±20ppm, Operating Temperature=-40℃~+85℃, AddInBom=yes, ConvertToPcb=yes, Datasheet=https://item.szlcsc.com/datasheet/Q13FC13500004/33310.html, FootprintName=FC-135R_L3.2-W1.5, ModelId=751105e878f044059ef0ee72de95f96e, ModelName=FC-135R_L3.2-W1.5, ModelTransform=125.984,59.055,0,0,0,0,0,0,0, Supplier=LCSC, Supplier Footprint=SMD3215-2P, SupplierPart=C32346, Symbol=Q13FC1350000400, Type=贴片晶振
?: library part ams1117-3.3_c6186, "输出极性:正极;工作电压:15V;输出电压:3.3V;输出电流:1A;电源纹波抑制比(PSRR):72dB@(120Hz);输出类型:固定;", JLCPCB Part Class="Basic Part", LCSC Part Name="3.3V 1A 15V", Manufacturer="Advanced Monolithic Systems", Operating Temperature=-40℃~+125℃, Output Current=1A, Output Voltage=3.3V, Power Supply Rejection Ratio (PSRR)=72dB@(120Hz), standby current=5mA, Voltage - Supply=15V, Voltage Dropout=1.1V@(800mA), AddInBom=yes, ConvertToPcb=yes, Datasheet=https://item.szlcsc.com/datasheet/AMS1117-3.3/6652.html, Features=短路保护；热关断；过流保护, FootprintName=SOT-223-3_L6.5-W3.4-P2.30-LS7.0-BR, ManufacturerPart=AMS1117-3.3, ModelId=925194bf9823436183a3e0b978a8d076, ModelName=SOT-223-4P_L6.5-W3.5-H1.6-LS7.0-P2.30, ModelTransform=279.89794,255.905,0,180,0,0,-3.9385,-0.0005,0, Noise=0.003%Vout, Number of Outputs=1, Output Configuration=正极, Output Type=固定, Supplier=LCSC, Supplier Footprint=SOT-223, SupplierPart=C6186, SymbolName=AMS1117-3.3

## Free pads (board coordinates)
  round 216.54 hole 141.73: 0(157.48,157.48) 0(157.48,2204.72) 0(2992.13,157.48) 0(2992.13,2204.72)

## Via types
v1: diameter 15.75, hole 11.81, Top Layer to Bottom Layer, 70 vias
v2: diameter 28, hole 28, Top Layer to Bottom Layer, 8 vias

## Nets (pads, with @x,y where several pads share a name; then routed paths per layer and width w, separated by ;. In a path a pad name is that pad's centre, name@x,y a point inside that pad or via, vN(x,y) a via of type N, cw(c..) or ccw(c..) an arc to the next point about the centre after c; other vN are vias at no path point)
A: D2.2 J3.4 J4.4 J5.4 R11.1 U7.3 | length 2992.1
  Top Layer w15: U7.3 2745,2241 2931,2055 3034,2055 3054,2035 3054,1608 ; R11.1 2724.3,744.6 D2.2 2738.9,533.1 2805.7,466.3 J5.4 3054,533.3 3054,1025 ; J4.4@2979.2,1021.1 J4.4 3050.1,1021.1 3054,1025 ; J3.4 2997.7,1619 3043,1619 3054,1608 ; 3054,1025 3054,1608
B: D1.1 J3.3 J4.3 J5.3 R9.1 U7.2 | length 2826.3
  Top Layer w15: U7.2 2360.2,2148.2 2360,2148 2435,2073 2760,2073 2828,2005 2828,1671 ; R9.1@2698.8,1475.5 2828,1346.3 ; R9.1@2703.3,1480 2703.3,1580.3 D1.1 ; J3.3 2888.2,1731.2 2828,1671 ; J4.3 2831.4,1119.6 2828,1123 ; J5.3 2892.5,564.8 2828,629.3 2828,1123 ; 2828,1123 2828,1346.3 ; 2828,1346.3 2828,1671
BOOT0: K4.3 K4.4 R5.1 U1.44 | length 2207.8
  Top Layer w10: K4.3 K4.4 563,1691.4 R5.1 563.4,1604.6 746.71,1421.29 v1(1456.92,1421.29) ; 1931.72,1205.5 U1.44
  Bottom Layer w10: v1(1456.92,1421.29) 1456.92,1304.08 1556,1205 v1(1922,1205)
D+: J2.3 U2.1 | length 247.1
  Top Layer w10: J2.3 570.51,1275 U2.1
D-: J2.2 U2.2 | length 152.1
  Top Layer w10: J2.2 749.1,1230.3 U2.2
GND: ?.1 C1.1 C2.1 C3.1 C4.1 C5.2 C6.1 C8.1 C9.1 C10.1 C11.1 C12.2 D1.2 D2.1 H1.1 H1.2 H1.39 H1.40 H2.2 J1.2 J2.4 J2.5 J2.6 J3.2 J4.2 J5.2 K1.3 K1.4 K2.3 K2.4 K3.3 K3.4 R4.1 R5.2 R8.2 U1.8 U1.23 U1.35 U1.47 U2.3 U5.5 U7.1 | length 209.6
  Top Layer w10: v1(1935,1146) 1935.5,1146.5 U1.47 ; U1.8 2174.6,1025.74 v1(2175.27,1025.07)
  Top Layer w12: U1.35 2056.5,1370.5 2075,1352 ; 2254,1306 2271.6,1323.6 U1.23
  other v1: 2834.65,118.11 435.19,188.63 2992.13,314.96 511.81,551.18 1684.05,707.74 1692.91,866.14 1102.36,1023.62 2120.1,1335.12 1614.17,1417.32 236.22,1496.06 551.18,1496.06 472.44,1574.8 1496.06,1574.8 1692.91,1574.8 1209.1,1597.38 1888.97,1604.98 629.92,1614.17 2598.43,1732.28 782.84,1769.97 1176.54,1769.97 1215.91,1848.71 2598.43,1889.76 590.55,1929.13 1496.06,1929.13 1692.91,1929.13 157.48,1968.5 354.33,1968.5 1653.54,2007.87 1889.76,2007.87 2086.61,2007.87 1215.91,2045.56 2677.17,2165.35 861.58,2203.04 1929.13,2204.72 1141.73,2244.09 2834.65,2283.46
NetC5_1: C5.1 U2.8 | length 99
  Top Layer w10: U2.8 1057.5,1275 C5.1
NetLED1_1: LED1.1 R4.2 | length 82.3
  Top Layer w15: R4.2 970.4,611.2 LED1.1
NetLED2_1: LED2.1 R12.2 | length 80.9
  Top Layer w15: R12.2 969.4,726.2 LED2.1
NetLED3_1: LED3.1 R13.2 | length 86.5
  Top Layer w15: R13.2 967.8,846.2 LED3.1
NetR9_2: R9.2 R10.2 U5.7 | length 557.8
  Top Layer w15: R9.2 2615.6,1342.4 2760.85,1197.15 R10.2 2759.78,1079.07 2665.07,1079.07 U5.7
NetR10_1: R10.1 R11.2 U5.6 | length 319.4
  Top Layer w15: R11.2 2645.6,853.8 2705.53,913.73 2760.85,969.05 R10.1 2753.7,1028 U5.6
nRTS: C2.2 K1.1 K1.2 R1.2 U1.7 | length 2970.6
  Top Layer w8: U1.7 2155,1067.6 2155,1003 v1(2157,1001)
  Top Layer w10: K1.2 K1.1 942.7,2101.4 R1.2 R1.2@945.4,2104.1 ; C2.2 R1.2@945.4,2104.1 ; v1(1408,2038) 1406,2040 1320.5,2040 1193.5,2167 1008.3,2167 R1.2@945.4,2104.1
  Bottom Layer w8: v1(1408,2038) 1408,1257.51 1666.51,999 2155,999 v1(2157,1001)
OSC32_IN: C4.2 U1.3 X2.2 | length 256.1
  Top Layer w10: C4.2 2009.8,965 X2.2 2054.53,969.2 2076.1,990.77 U1.3
OSC32_OUT: C6.2 U1.4 X2.1 | length 361.7
  Top Layer w10: C6.2 X2.1 ; X2.1@2015,870.7 2064.7,870.7 2095.8,901.8 U1.4
OSC_IN: C1.2 U1.5 X1.2 | length 469.9
  Top Layer w10: C1.2 1930.1,755 X1.2 2055,755 2115.5,815.5 U1.5
OSC_OUT: C3.2 U1.6 X1.1 | length 447.1
  Top Layer w10: U1.6 2135.2,815.5 X1.1 C3.2
PA0: H1.16 U1.10 | length 1365.4
  Top Layer w8: U1.10 2213.9,1011.1 v1(2215,1010)
  Bottom Layer w8: H1.16 1542,313 1542,623 1590,671 2151,671 2215,735 v1(2215,1010)
PA1: H1.17 U1.11 | length 1434.3
  Top Layer w8: v1(2235,985) U1.11@2235,1066.3
  Top Layer w10: U1.11 U1.11@2235,1066.3
  Bottom Layer w8: H1.17 1591,260 1591,571 1670,650 2165,650 2235,720 v1(2235,985)
PA4: H1.20 U1.14 | length 1384.9
  Top Layer w8: U1.14 2359.5,1146.5 v1(2360,1147)
  Bottom Layer w8: H1.20 1742,313 1742,527 1803,588 2220,588 2293,661 2293,991 2360,1058 v1(2360,1147)
PA5: H1.21 U1.15 | length 1542.4
  Top Layer w8: U1.15 2401.9,1166.1 v1(2405,1163)
  Bottom Layer w8: H1.21 1840,224.69 1798.88,265.8 1791.89,272.8 1791.89,501.88 1856,566 2236,566 2312,642 2312,978 2405,1071 2405,1118 v1(2405,1163)
PA6: H1.22 U1.16 | length 1424.2
  Top Layer w8: U1.16 2368.96,1185.8 v1(2370.34,1187.17)
  Bottom Layer w8: H1.22 1842,313 1842,475 1910,543 2252,543 2332,623 2332,969 2427,1064 2427,1114 2427,1169 2408.83,1187.17 v1(2370.34,1187.17)
PA7: H1.23 U1.17 | length 1542.8
  Top Layer w8: U1.17 v1(2401.5,1205.5)
  Bottom Layer w8: H1.23 1940,224.69 1898.22,266.47 1892,272.69 1892,437 1972,517 2273,517 2351,595 2351,961 2443,1053 2443,1194 2431.5,1205.5 v1(2401.5,1205.5)
PA8: H1.33 U1.29 | length 1944.1
  Top Layer w8: v1@2174,1534 v1(2174.3,1533.7) 2174.6,1533.4 U1.29
  Bottom Layer w8: v1(2174.3,1533.7) 2539.3,1533.7 2640,1433 2640,906 2586,852 2586,493 2488,395 2488,259 H1.33
PA11: H1.5 U1.32 | length 2155.5
  Top Layer w10: H1.5 1040,221.86 993,268.86 993,273.54 993,368 1125,500 1275,650 1275,1153 1397,1275 1680,1275 1910,1505 2095.5,1505 2115.5,1485 U1.32
PA12: H1.6 U1.33 | length 1937.6
  Top Layer w10: H1.6 1042,313 1042,365 1301,624 1301,1129 1417,1245 1700,1245 1935,1480 2085,1480 2095.8,1469.2 U1.33
PA15: H1.7 U1.38 | length 1750
  Top Layer w10: H1.7 1093.55,257.45 1093.55,338.24 1093.55,372.55 1330,609 1330,1106 1439,1215 1700,1215 1808.6,1323.6 U1.38
PB0: H1.24 U1.18 | length 1427.4
  Top Layer w8: U1.18 v1(2370.31,1225.2)
  Bottom Layer w8: H1.24 1942,313 1942,415 2022,495 2300,495 2374,569 2374,952 2459,1037 2459,1206 2439.8,1225.2 v1(2370.31,1225.2)
PB1: H1.25 U1.19 | length 1556.4
  Top Layer w8: U1.19 2402.61,1244.9 v1(2404.34,1243.17)
  Bottom Layer w8: H1.25 2040,224.69 1996.27,268.41 1992,272.69 1992,407 2056,471 2315,471 2394,550 2394,941 2477,1024 2477,1071 2477,1220 2453.83,1243.17 v1(2404.34,1243.17)
PB2: H1.26 R8.1 U1.20 U5.2 U5.3 | length 1997.6
  Top Layer w8: U1.20 2369.4,1264.6 v1(2370,1264) 2519,1264 2544,1239 2544,1098 2524,1078 U5.2@2450.47,1078 ; U5.3 2446.1,1073.63 2448.29,1075.81 U5.2@2450.47,1078 ; U5.2 U5.2@2450.47,1078 ; 2515.6,1264 R8.1
  Bottom Layer w8: H1.26 2042,313 2042,393 2099,450 2325,450 2417,542 2417,930 2496,1009 2496,1225 2457,1264 v1(2370,1264)
PB3: H1.8 U1.39 | length 1577.6
  Top Layer w10: H1.8 1142,313 1142,382 1361,601 1361,1093 1458,1190 1715,1190 1828.9,1303.9 U1.39
PB4: H1.9 U1.40 | length 1640.3
  Top Layer w10: H1.9 1240,224 1192,272 1192,376 1392,576 1392,1077 1480,1165 1730,1165 1849.3,1284.3 U1.40
PB5: H1.10 U1.41 | length 1463.7
  Top Layer w10: H1.10 1242,313 1242,376 1424,558 1424,1060 1499,1135 1735,1135 1864.6,1264.6 U1.41
PB8: H1.13 R12.1 U1.45 | length 2476.7
  Top Layer w10: v2(778,512) 778,674.7 R12.1 ; H1.13 1393.55,257.45 1393.55,330.24 1394,330.69 1394,388 1513.58,507.58 1513.58,970.58 1598,1055 1775,1055 1905.8,1185.8 U1.45
  Bottom Layer w10: v2(778,512) 1184,512 1290,406 1290,282 1312,260 1391,260 H1.13
PB9: H1.14 R13.1 U1.46 | length 2318.2
  Top Layer w10: R13.1 824.5,806.5 858,773 v2(858,539) ; H1.14 1442,313 1442,398 1537,493 1537,952 1610,1025 1785,1025 1926.1,1166.1 U1.46
  Bottom Layer w10: v2(858,539) 1400,539 1440,499 H1.14
PB10: H1.27 U1.21 | length 1569
  Top Layer w8: U1.21 2403.7,1284.3 v1(2404,1284)
  Bottom Layer w8: H1.27 2091,260 2091,405 2115,429 2334,429 2442,537 2442,919 2513,990 2513,1236 2465,1284 v1(2404,1284)
PB11: H1.28 U1.22 | length 1454.6
  Top Layer w8: U1.22 2369.1,1303.9 v1(2370,1303)
  Bottom Layer w8: H1.28 2142,313 2142,399 2153,410 2337.01,410 2348,410 2463,525 2463,900 2532,969 2532,1245 2474,1303 v1(2370,1303)
PB12: H1.29 U1.25 | length 1715.9
  Top Layer w8: U1.25 2276.83,1402.4 v1(2278.68,1400.55) v1@2280.53,1398.69
  Bottom Layer w8: H1.29 2240,224.69 2204.81,259.88 2189,275.69 2189,368 2215,394 2358,394 2489,525 2489,890 2551,952 2551,1350 2500.45,1400.55 v1(2278.68,1400.55)
PB15: H1.32 U1.28 | length 1802.3
  Top Layer w8: U1.28 2194.3,1505.3 v1(2194.65,1505.65) v1@2195,1506
  Bottom Layer w8: v1(2194.65,1505.65) 2529.35,1505.65 2619,1416 2619,920 2564,865 2564,507 2368,311 H1.32
PC13: H1.15 U1.2 | length 1298.8
  Top Layer w10: H1.15 1540,217.86 1587.86,265.72 1591.76,269.61 1591.76,948.76 1647.51,1004.51 2037.01,1004.51 2056.5,1024 U1.2
RXD1: H1.4 U1.31 U2.6 | length 2712.6
  Top Layer w10: H1.4 942,313 942,365 1220,643 1220,890 1155,955 980,955 890,1045 890,1155 910,1175 U2.6 1236.64,1175 1366.64,1305 1650,1305 1875,1530 2110,1530 2135.2,1504.8 U1.31
RXD2: H1.19 U1.13 U5.1 | length 1590.7
  Top Layer w8: v1(2312.4,1097.6) U1.13 2376.05,1126.8 2444.9,1126.8 U5.1
  Bottom Layer w8: H1.19 1740,224.69 1691,273.69 1691,546 1753,608 2202,608 2273,679 2273,995 2312.4,1034.4 v1(2312.4,1097.6)
SCL1: H1.11 H2.3 R7.1 U1.42 | length 2363.8
  Top Layer w10: H1.11 1340,221.86 1292,269.86 1292,386 1453.74,547.74 1453.74,1022.74 1541,1110 1755,1110 1889.9,1244.9 U1.42 2031.9,1244.9 v1(2032,1245) ; R7.1 2273,1846 H2.3
  Bottom Layer w10: v1(2032,1245) 2032,1601 2112,1681 2258,1681 2273,1696 H2.3
SDA1: H1.12 H2.4 R6.1 U1.43 | length 2293.2
  Top Layer w10: H1.12 1342,313 1342,376 1482.4,516.4 1482.4,1003.4 1562,1083 1768,1083 1910.2,1225.2 U1.43 1977.9,1225 v1(2060,1225) ; H2.4 2375,1746 R6.1
  Bottom Layer w10: v1(2060,1225) 2060,1599 2121,1660 2317,1660 2373,1716 H2.4
SW_DOWN: H1.31 K2.1 K2.2 R2.2 U1.27 | length 5264.1
  Top Layer w8: U1.27 v1(2213.9,1478.06) v1@2216.53,1480.69
  Top Layer w10: K2.1 78.3,821 341.6,821 526.3,821 R2.2 ; 341.6,818.6 314,791 314,109 361,62 2305,62 2340,97 H1.31
  Bottom Layer w8: v1(2213.9,1478.06) 2214.96,1477 2517,1477 2598,1396 2598,933 2539,874 2539,521 2383,365 2307,365 2286,344 2286,265 H1.31 2349,220 H1.31@2374,220
SW_UP: H1.30 K3.1 K3.2 R3.2 U1.26 | length 4233.3
  Top Layer w8: U1.26 v1(2233.6,1452.76) ; H1.30@2240,298 H1.30
  Top Layer w10: K3.1 534.9,321.4 534,320.5 534,135 567,102 2164,102 2191,129 2191,262 H1.30
  Bottom Layer w8: v1(2233.6,1452.76) 2492.24,1452.76 2574,1371 2574,942 2510.5,878.5 2510.5,520.5 2370,380 2255,380 2240,365 H1.30
  Bottom Layer w10: v1(78.31,323.78) v1(436.51,323.78)
SWCLK: J1.4 U1.37 | length 992.1
  Top Layer w8: U1.37 v1(1977.7,1369.7)
  Bottom Layer w8: J1.4 1684.7,2093.3 1977.7,1800.3 v1(1977.7,1369.7)
SWDIO: J1.3 U1.34 | length 1075.4
  Top Layer w8: v1(1955,1456) 2059,1456 2076.1,1438.9 U1.34
  Bottom Layer w8: J1.3 1586.2,2156.8 1955,1788 v1(1955,1456)
TXD1: H1.3 U1.30 U2.7 | length 2906.8
  Top Layer w10: H1.3 893.55,257.45 893.55,338.24 893.55,372.55 1180,659 1180,845 1110,915 955,915 865,1005 865,1170 920,1225 U2.7 970.6,1220 1225,1220 1340,1335 1640,1335 1860,1555 2125,1555 2154.9,1525.1 U1.30
TXD2: H1.18 U1.12 U5.4 | length 1500.2
  Top Layer w8: U1.12 2253.3,1010.7 v1(2254,1010) 2351,1010 2383,978 U5.4
  Bottom Layer w8: H1.18 1642,313 1642,574 1698,630 2182,630 2254,702 v1(2254,1010)
VCC3V3: ?.2 ?.4 C10.2 C11.2 C12.1 H1.35 H1.36 H2.1 J1.1 K4.1 K4.2 LED1.2 LED2.2 LED3.2 R1.1 R2.1 R3.1 R6.2 R7.2 U1.1 U1.9 U1.24 U1.36 U1.48 U5.8 | length 11714.3
  Top Layer w10: R3.1 594.6,812 R2.1 647,820 722,895 v2(810,895) 1017,895 1028.5,883.5 LED3.2 LED2.2 1028.5,612 LED1.2 ; C10.2 1003.6,2010.2 R1.1 1198,2103 v1@1302,1999 ; H2.1 2073,1891 2093.3,1911.3 R7.2 R6.2
  Top Layer w12: K4.1 K4.2 691.4,1868.6 736,1824 736,1533 767.9,1501.1 v2(978,1501.1) ; U1.48 2021.6,1126.8 2036.8,1142 ; U1.1 2036.8,1142 ; U1.36 2036.8,1359 2145.3,1250.5 ; U1.9 2194.3,1201.5 2145.3,1250.5 ; U1.24 U1.24@2299.8,1343.3 ; 2315,1358.5 U1.24@2299.8,1343.3 ; 2323,1437 2337,1423 2548,1423 2588,1383 2588,1290.5 C12.1 2654.5,1137.5 U5.8 ; 2036.8,1142 2145.3,1250.5 ; 2145.3,1250.5 2238.1,1343.3 U1.24@2299.8,1343.3
  Top Layer w50: v2(978,1501.1) 1006.1,1501.1 1249,1744 H2.1 2073,1658 2107,1624 2269,1624 2323,1570 2323,1437 2323,1365 ; ?.2 v2(978,1812.65) 978,1890.4 C11.2 980.8,1892 982.35,1893.55 982.35,1988.95 C10.2
  Bottom Layer w10: 711,897 713,895 v2(810,895)
  Bottom Layer w50: v2@975,1501.1 v2(975,1709) ; J1.1 1303,2127.6 v1(1303,1998) 1303,1605 1199.1,1501.1 v2(978,1501.1) 855,1378.1 855,1128 711,984 711,897 711,177 791,97 2480,97 2485,102 2485,156 H1.35 H1.36
VCC5V: ?.3 C7.1 C8.2 C9.2 H1.37 H1.38 J2.1 U2.5 | length 5491.6
  Top Layer w10: v1@677,1368 691.57,1353.43 v1(968.9,1353.43) ; U2.5 1059.9,1125 C7.1
  Top Layer w50: C9.2 885.1,1898.4 887.5,1896 v2(887.5,1815.5) ?.3
  Bottom Layer w10: v1@967,1354 967.5,1353.5 v1(967.5,1124.43)
  Bottom Layer w40: 604.51,921.49 360,1166 360,1315 620.05,1315 815.18,1510.13 815.18,1694.18 833,1712 v2(887,1712)
  Bottom Layer w50: J2.1 604.51,921.49 604.51,121.49 689,37 2564,37 2640,113 H1.37 H1.38
  other v1: 678.9,1367.43
pads on no net: C7.2 H1.34 J3.1 J4.1 J5.1 U2.4

## Polygon pours and split planes (outlines as drawn)
GND on Top Layer "GND_L01_P000" (solid, pour order 0): 6.15,-1.3 6.15,2360.91 3155.76,2360.91 3155.76,-1.3
GND on Bottom Layer "GND_L02_P002" (solid, pour order 2): 0,0 0,2362.2 3149.61,2362.2 3149.61,0

## Keep-outs
Keep-Out Layer:
  lines w7.87: 0,98.43 ccw(c98.43,98.43) 98.43,0 3051.18,0 ccw(c3051.18,98.43) 3149.61,98.43 3149.61,2263.78 ccw(c3051.18,2263.78) 3051.18,2362.2 98.43,2362.2 ccw(c98.43,2263.78) 0,2263.78 0,98.43

## Other copper
Top Layer:
  rectangle net VCC3V3: 2282,1335 2348,1382

## Silkscreen, mask and mechanical layers (free items; w line width, h text height)
Top Overlay:
  text "DIO" at 1566,2069 h40
  text "CLK" at 1679,2069 h40
  text "3V3" at 1313,2067.5 h40
  text "GND" at 1441,2068 h40
  text "A" at 2495,2053 h40
  text "B" at 2360,2052 h40
  text "GND" at 2177,2047 h40
  text "SWD" at 1452,1989.93 h80
  text "复位" at 510.07,1986.86 h80
  text "RS485" at 2267.94,1979.55 h60
  text "GND" at 2832,1882 h40 r270
  text "RS485" at 2753.7,1825 h60 r270
  text "B" at 2836,1724 h40 r270
  text "A" at 2832,1643 h40 r270
  text "OLED" at 2168.9,1620.36 h60
  text "BOOT" at 160,1580.93 h80
  text "STM32LF103C8T6最小系统" at 1153,1493.13 h80
  text "RS485" at 2768.7,1381 h60 r270
  text "GND" at 2836,1272 h40 r270
  text "B" at 2838,1113 h40 r270
  text "A" at 2836,1026 h40 r270
  text "电源" at 1246.03,833.03 h40
  text "GND" at 2833,715 h40 r270
  text "DOWN" at 400,705.7 h60
  text "RS485" at 2761.7,682 h60 r270
  text "B" at 2835,570 h40 r270
  text "扩展IO" at 1582.06,529.43 h80
  text "A" at 2833.72,476.48 h40 r270
  text "UP" at 395,390.7 h60
  text "5V" at 2651.3,379 h60 r90
  text "GND" at 2753.3,379 h60 r90
  text "PA0" at 1554.3,378 h60 r90
  text "PA2" at 1652,378 h60 r90
  text "PA4" at 1754,378 h60 r90
  text "PA6" at 1852.3,378 h60 r90
  text "PB0" at 1955.3,378 h60 r90
  text "PB2" at 2059,378 h60 r90
  text "PB11" at 2157,378 h60 r90
  text "PB13" at 2257.3,378 h60 r90
  text "PB15" at 2357.3,378 h60 r90
  text "NC" at 2458.35,378 h60 r90
  text "3V3" at 2554.3,378 h60 r90
  text "GND" at 855.3,377 h60 r90
  text "AP10" at 958.3,377 h60 r90
  text "PA12" at 1063,377 h60 r90
  text "PB3" at 1153.3,377 h60 r90
  text "PB5" at 1254.3,377 h60 r90
  text "PB7" at 1354,377 h60 r90
  text "PB9" at 1454.3,377 h60 r90
  text "2" at 763,286 h40 r90
  text "40" at 2854,285 h40 r90
  text "1" at 763,189.89 h40 r90
  text "39" at 2853,175.89 h40 r90
  text "5V" at 2651.3,77 h60 r90
  text "PA1" at 1653,52 h60 r90
  text "PB1" at 2058,51 h60 r90
  text "3V3" at 2553.3,49 h60 r90
  text "PA9" at 959.3,48 h60 r90
  text "PB4" at 1254,46 h60 r90
  text "PB6" at 1355.3,46 h60 r90
  text "PA7" at 1955,45 h60 r90
  text "PA3" at 1753.3,44 h60 r90
  text "PA5" at 1853.3,44 h60 r90
  text "AP8" at 2458.3,40 h60 r90
  text "GND" at 856.3,31 h60 r90
  text "GND" at 1454.3,31 h60 r90
  text "GND" at 2752.3,26 h60 r90
  text "PA11" at 1063,24 h60 r90
  text "PA15" at 1152.3,17 h60 r90
  text "PC13" at 1554.3,17 h60 r90
  text "PB12" at 2257,16 h60 r90
  text "PB14" at 2358,16 h60 r90
  text "PB10" at 2156.3,15 h60 r90